# Altium PCB nixie-tube-power.PcbDoc
Units mm, origin at the board's own origin, x right, y up, seen from the top; angles counter-clockwise.
Board outline 27 x 44 mm, 2 copper layers (Top Layer, Bottom Layer); 22 components, 16 nets, 65 pads, 8 vias.
Unrouted connection lines stored in the file: 1.
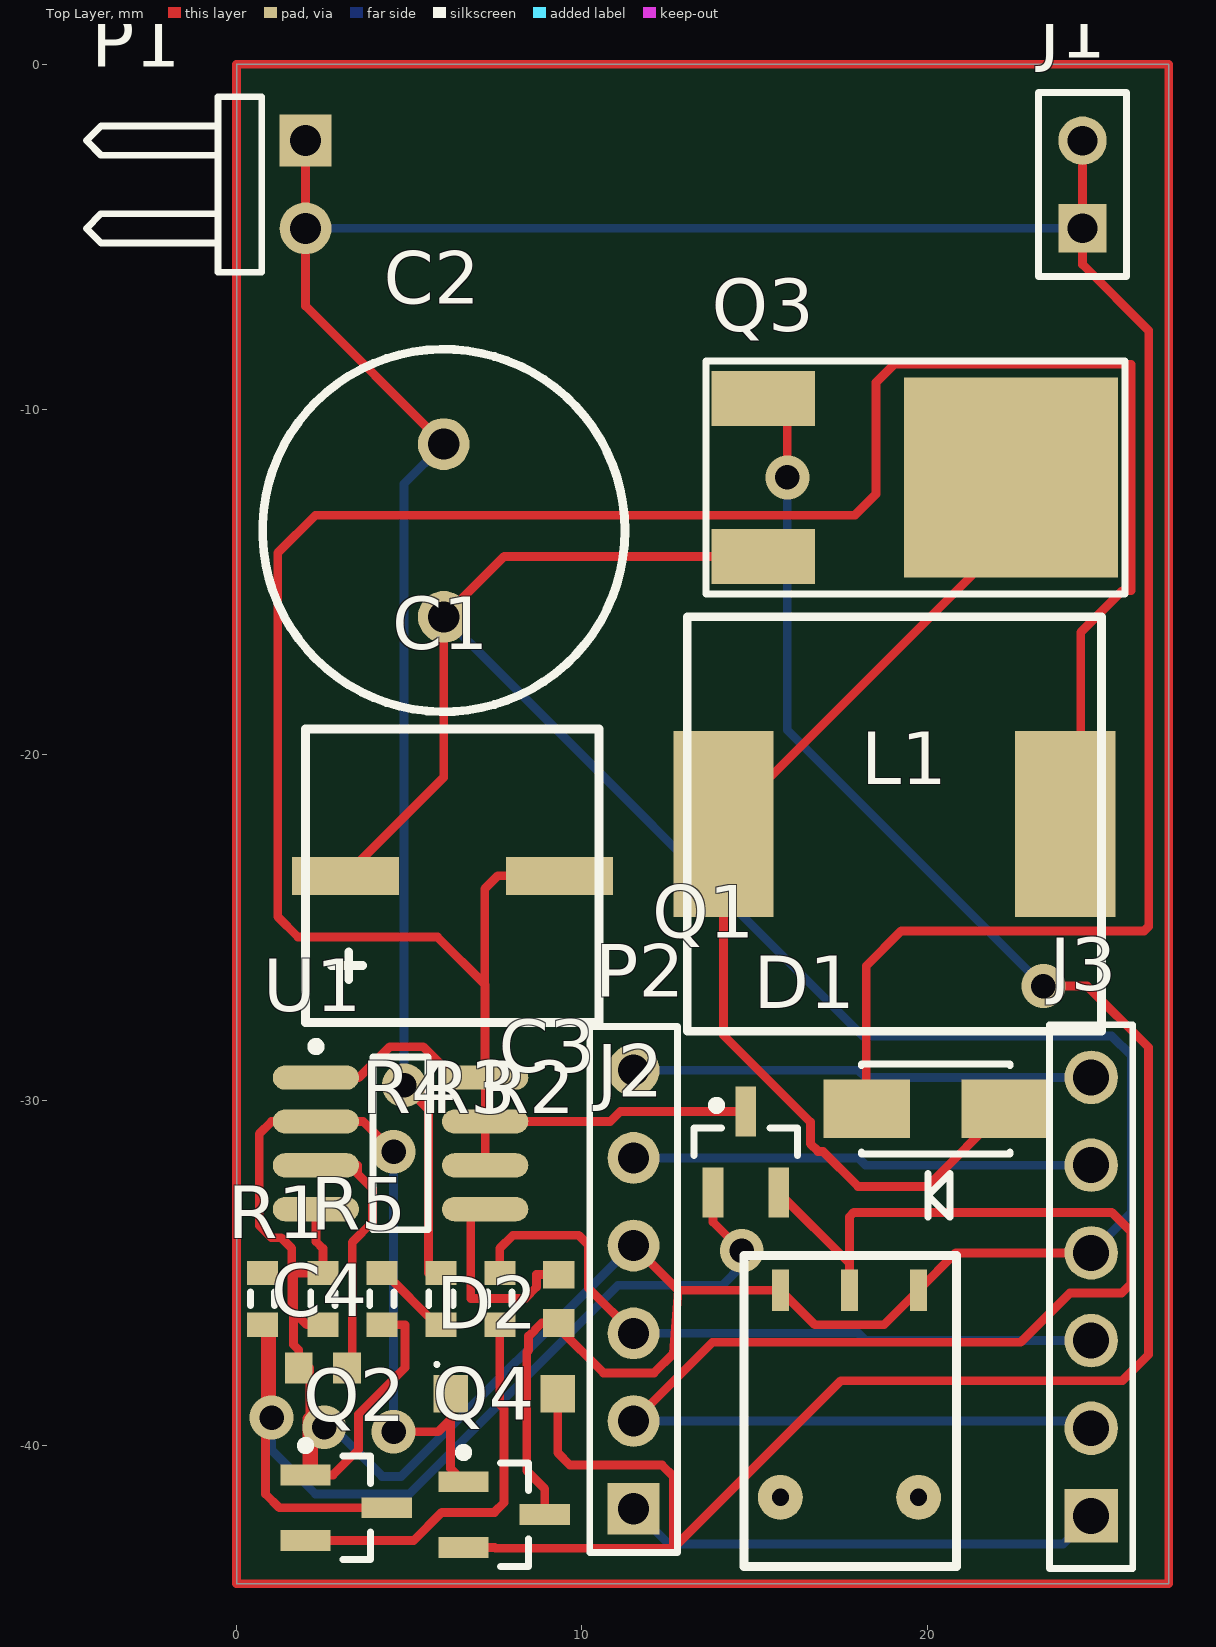
[diagram p0: Top Layer view]
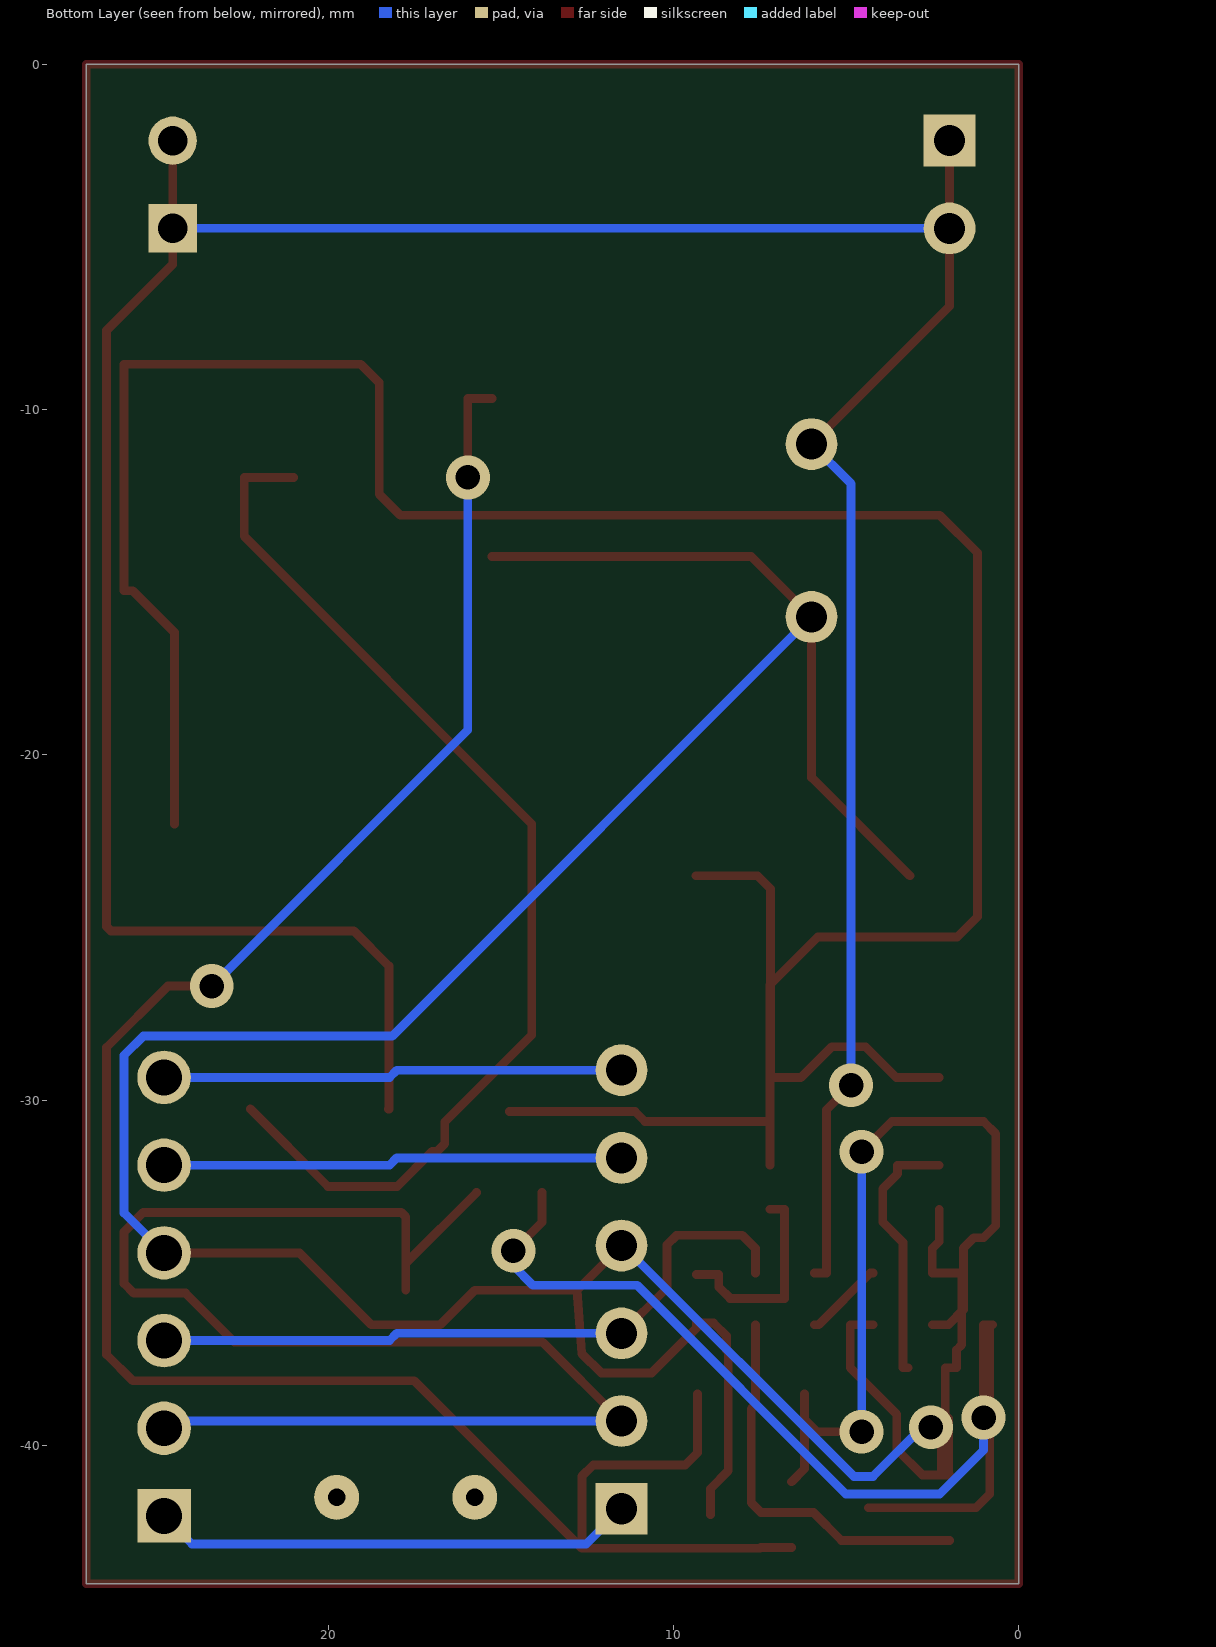
[diagram p1: Bottom Layer view, seen from below]

## Layer stack, top to bottom
Top Solder: solder mask 0.0102, Solder Resist, Dk 3.5
Top Layer: signal copper 0.0356
Dielectric 1: dielectric 0.32, FR-4, Dk 4.8
Bottom Layer: signal copper 0.0356
Bottom Solder: solder mask 0.0102, Solder Resist, Dk 3.5

## Board outline
0,-44 27,-44 27,0 0,0

## Design rules (kind name [scope] priority, off if disabled: settings)
Clearance [All] p1: gap=0.254 ignorepadtopadclearanceinfootprint=FALSE except(0: Arc-Hole Track-Hole SMDPad-Hole THPad-Hole Via-Hole Fill-Hole Poly-Hole Region-Hole Text-Hole)
PolygonConnect [All] p1: connectstyle=Relief reliefconductorwidth=0.254 reliefentries=4 polygonreliefangle="90 Angle" airgapwidth=0.254
RoomDefinition nixie-tube-power [InComponentClass('nixie-tube-power')] p1: confinementstyle=ConfineIn formatcopy=TRUE lockcomponents=FALSE outline 28.08,-42.502 62.58,-42.502 62.58,-27.752 28.08,-27.752
RoutingVias [All] p1: holewidth=0.711 width=1.27 viastyle="Through Hole" minholewidth=0.711 minwidth=1.27 maxholewidth=0.711 maxwidth=1.27
SolderMaskExpansion [All] p1: expansion=0.102
Width [All] p1: maxlimit=0.254 minlimit=0.254 preferedwidth=0.254
30 further rules are at their usual default settings.

## Components (designator, comment, footprint, x,y, rotation, side; value= is the part's Value field where it differs from the comment)
C1 "Cap" 220uF-35V-smd 6.25,-23.5 r90 top value=220uF
C2 "Cap" RB5-10.5 6,-13.5 r90 top value=4.7uF
C3 "Cap" 1608[0603] 9.332,-35.75 r90 top value=0.01uF
C4 "Cap" 1608[0603] 2.5,-37.75 r0 top value=0.01uF
D1 "RS1M" DIOD-SMA-2_A_V 20.25,-30.25 r180 top
D2 "Diode 1N4148" SODFL350X110-2N 7.75,-38.5 r0 top
J1 "SLW-102-01-F-S" SMTC-SLW-102-01-X-S 24.5,-4.75 r90 top
J2 "DC003a" DC003A 15.75,-41.5 r90 top
J3 "SSW-106-02-G-S" SMTC-SSW-106-02-X-S 24.75,-42.04 r90 top
L1 "CD127-inductor" cd127-220uH 19.05,-22 r0 top value=220uH
P1 "Header 2H" HDR1X2H 2,-2.21 r270 top
P2 "Header 6" HDR1X6 11.5,-41.83 r90 top
Q1 "AO3407" SOT23_M 14.75,-31.5 r90 top
Q2 "npn" SOT-23_M 3.175,-41.8 r0 top
Q3 "FQD5N60C" SC_TO-252AA 22.43,-11.964 r180 top
Q4 "SS850" SOT-23_M 7.75,-42 r0 top
R1 "Res1" J1-0603 0.75,-35.75 r90 top value=1K
R2 "Res1" J1-0603 7.624,-35.75 r90 top value=1K
R3 "Res1" J1-0603 5.916,-35.75 r90 top value=1K
R4 "Res1" J1-0603 4.208,-35.75 r90 top value=1K
R5 "Res1" J1-0603 2.5,-35.75 r270 top value=1K
U1 "MC34063EBD-TR" SO8_M 4.75,-31.25 r0 top

## Footprints (in the part's own frame and the unit in brackets; to place one, negate y for a bottom-side part, rotate by r counter-clockwise, add the part's x,y. Pads: shape width x height; smd on the part's side, far side on the other; paste and mask are expansions set on the pad)
220uF-35V-smd [mm] "smd capacitance"
  rect 1.1x3.1 smd: 1(0,3.1) 2(0,-3.1)
  silkscreen extent -4.25,-4.25 4.25,4.25
1608[0603] [mm] "Chip Capacitor, Body 1.6x0.8mm, IPC High Density"
  rect 0.8x0.9 smd: 1(-0.7,0) 2(0.7,0)
  body extent -0.87,-0.48 0.87,0.48, height 1.3
cd127-220uH [mm] "smd inductor 220uH"
  rect 2.9x5.4 smd: 1(-4.95,0) 2(4.95,0)
  silkscreen extent -6,-6 6,6
DC003A [mm] "Dc jack 003A"
  rect 1.2x0.5 smd: 1(6,-2) 2(6,0) 3(6,-4)
  round 1.3 hole 0.5 unplated: ~(0,0) ~(0,-4)
  silkscreen extent -2,-5.1 7,1.05
DIOD-SMA-2_A_V [mm] "SMA, 2-Leads, Body 4.3x2.605mm"
  rect 2.5x1.7 smd: 1(-2,0) 2(2,0)
  silkscreen extent -2.15,-1.3 2.15,3.14, body extent -2.52,-1.46 2.52,1.46, height 2.4
HDR1X2H [mm] "Connector; Header; 2 Position; Right Angle"
  rect 1.5x1.5 hole 0.9: 1(0,0)
  round 1.5 hole 0.9: 2(2.54,0)
  silkscreen extent -1.27,-6.35 3.81,-1.27
HDR1X6 [mm] "Connector; Header; 6 Position"
  rect 1.5x1.5 hole 0.9: 1(0,0)
  round 1.5 hole 0.9: 2(2.54,0) 3(5.08,0) 4(7.62,0) 5(10.16,0) 6(12.7,0)
  silkscreen extent -1.27,-1.27 13.97,1.27
J1-0603 [mm] "Chip Resistor, Body 1.6x0.8mm, IPC High Density"
  rect 0.7x0.9 smd: 1(-0.75,0) 2(0.75,0)
  silkscreen extent -0.2,-0.35 0.2,0.35, body extent -0.85,-0.48 0.85,0.48, height 0.9
RB5-10.5 [mm] "Capacitor (Radial); 2 Leads"
  round 1.5 hole 0.9: 1(-2.5,0) 2(2.5,0)
  silkscreen extent -5.25,-5.25 5.25,5.25
SC_TO-252AA [mm] "D-PAK"
  rect 3x1.6 smd: 1(7.18,-2.286) 3(7.18,2.286)
  rect 6.2x5.8 smd: 2(0,0)
  silkscreen extent -3.3,-3.38 8.84,3.38, body extent -2.7,-3.29 7,3.29, height 2.3
SMTC-SLW-102-01-X-S [mm] "Low Profile Socket Strip, 1x2 Pins, Vertical, 2.54mm Pitch, Female"
  rect 1.4x1.4 hole 0.86: 1(0,0)
  round 1.4 hole 0.86: 2(2.54,0)
  silkscreen extent -1.39,-1.27 3.94,1.27, body extent -1.27,-1.27 3.81,1.27, height 4.57
SMTC-SSW-106-02-X-S [mm] "SQ Post Socket, 1x6 Pins, Vertical, 2.54mm Pitch, Female"
  rect 1.55x1.55 hole 1.04: 1(0,0)
  round 1.55 hole 1.04: 2(2.54,0) 3(5.08,0) 4(7.62,0) 5(10.16,0) 6(12.7,0)
  silkscreen extent -1.53,-1.2 14.23,1.21, body extent -1.52,-1.21 14.22,1.21, height 8.51
SO8_M [mm] "SOIC, 8-Leads, Body 4.9x3.9mm, Pitch 1.27mm, IPC Low Density"
  oval 2.5x0.7 smd: 1(-2.45,1.905) 2(-2.45,0.635) 3(-2.45,-0.635) 4(-2.45,-1.905) 5(2.45,-1.905) 6(2.45,-0.635) 7(2.45,0.635) 8(2.45,1.905)
  silkscreen extent -2.57,-2.5 0.8,2.93, body extent -2,-2.5 2,2.5, height 1.75
SODFL350X110-2N [mm] "SODFL, 2-Leads, Body 1.70x3.50mm, IPC Medium Density"
  rect 1x1.1 smd: 1(-1.55,0) 2(1.55,0)
  silkscreen extent -2,0.8 -1.9,0.9, body extent -1.75,-0.95 1.75,0.95, height 1.1
SOT23_M [mm] "SOT23, 3-Leads, Body 2.9x1.3mm, Pitch 0.95mm, Lead Span 2.3mm - Reverse Pinning, IPC Low Density"
  rect 1.45x0.6 smd: 1(-1.175,0.95) 2(1.175,0) 3(-1.175,-0.95)
  silkscreen extent -0.1,-1.5 1.47,1.5, body extent -0.7,-1.5 0.7,1.5, height 1.1
SOT-23_M [mm] "SOT23, 3-Leads, Body 2.9x1.3mm, Pitch 0.95mm, Lead Span 2.5mm, IPC Low Density"
  rect 1.45x0.6 smd: 1(-1.175,0.95) 2(-1.175,-0.95) 3(1.175,0)
  silkscreen extent -1.3,-1.5 0.7,1.92, body extent -0.7,-1.5 0.7,1.5, height 1.1

## Part data
C1 C3 C4: "Capacitor", LatestRevisionDate=17-Jul-2002, LatestRevisionNote="Re-released for DXP Platform.", PackageDescription="Radial Cap, Thru-Hole; 2 Leads; 0.3 in Pin Spacing", PackageReference=RAD-0.3, Published=8-Jun-2000, Publisher="Altium Limited"
  C1: PurchaseLink=https://world.taobao.com/item/537495926937.htm
  C3 C4: PurchaseLink=https://world.taobao.com/item/525960892359.htm
C2: "Capacitor", Voltage=250V, LatestRevisionDate=17-Jul-2002, LatestRevisionNote="Re-released for DXP Platform.", PackageDescription="Radial Cap, Thru-Hole; 2 Leads; 0.3 in Pin Spacing", PackageReference=RAD-0.3, Published=8-Jun-2000, Publisher="Altium Limited", PurchaseLink=https://world.taobao.com/item/525902443723.htm
D1: library part CMP-1667-00001-4, "Ultra-Fast Rectifier, 1 A, 1.7 V, -65 to 150 degC, 2-Pin SMD, RoHS, Tape and Reel", Manufacturer="Diodes Inc", Max Operating Temperature="150 degC", Min Operating Temperature="-65 degC", Package Quantity=1, ComponentLink1Description="Manufacturer URL", ComponentLink1URL=http://www.diodes.com/, ComponentLink2Description=Datasheet, ComponentLink2URL=http://www.diodes.com/_files/datasheets/ds16008.pdf, DatasheetVersion="Rev. 11-2, 12/2014", Height="2.1 mm", Length="4.6 mm", Mount="Surface Mount", Mounting Technology="Surface Mount", PackageDescription="2-Pin Surface Mount Device, Body 4.3 x 2.605 mm", PackageReference=SMA-2, Packaging="Cut Tape", Pins=2, PurchaseLink=https://world.taobao.com/item/526206815649.htm, REACH SVHC=Yes, RoHSCompliant=true
D2: "High Conductance Fast Diode", Code_JEDEC=DO-204-AH, ComponentLink1Description="Manufacturer Link", ComponentLink1URL=http://www.fairchildsemi.com/, ComponentLink2Description=Datasheet, ComponentLink2URL=http://www.fairchildsemi.com/ds/1N%2F1N4148.pdf, DatasheetVersion=1997, LatestRevisionDate=17-Jul-2002, LatestRevisionNote="Re-released for DXP Platform.", PackageDescription="Diode, Axial; Body 3.8 x 1.9 mm (LxDia. max), Lead Dia. 0.53 mm (max)", PackageReference=DO-35, Published=8-Jun-2000, Publisher="Altium Limited", PurchaseLink=https://world.tmall.com/item/547099216928.htm
J1: library part CMP-1023-00122-1, "Low Profile Socket Strips, Through-hole, Vertical, -55 to 125 degC, 2.54 mm Pitch, 2-Pin, Female, RoHS", Manufacturer=Samtec, Temperature Range="-55 to 125 degC", ComponentLink1Description="Manufacturer URL", ComponentLink1URL=http://www.samtec.com, ComponentLink2Description=Datasheet, ComponentLink2URL=http://www.samtec.com/documents/webfiles/pdf/SLW.PDF, ComponentLink3Description="Package Specification", ComponentLink3URL=http://www.samtec.com/documents/webfiles/cpdf/SLW-1XX-01-X-X-MKT.pdf, DatasheetVersion=F-214, Mounting Technology=Through-hole, Orientation=Vertical, PackageDescription="Low Profile Socket Strip", PackageReference=SLW-102-01-X-S, PackageVersion="X, 9/1987", PartNumber=SLW-102-01-F-S, Pitch="2.54 mm", RoHS=True
J2: library part CMP-2000-06895-1, "Through Hole Right Angle DC Power Jack, 2.5 A, 2 mm Center Pin, 3 Position, -25 to 85 degC, RoHS, Bulk", Current Rating=2.5A, Flammability Rating=UL94V-0, Insulation Resistance=50MOhms, Manufacturer=CUIInc., Operating Temperature Range=-25Cto+85C, Package Description="3-Pin Through Hole Device, Body 14.4 x 9 mm, Height 11 mm", Package Reference=PJ-002A, Voltage Rating=24V, Brand=CUI, Connector Type=DCPowerJack, Contact Gender=Male, Contact Material=Copper, Contact Plating=Nickel, Datasheet URL=http://www.cui.com/product/resource/pj-002a.pdf, Datasheet Version="Rev. 1.03, 04/2016", Factory Pack Quantity=500, Housing Material=PolybutyleneTerephthalate(PBT), Inside Contact Diameter=2mm, Manufacturer URL=http://www.cui.com/, Mounting Angle=Right, Mounting Style=ThroughHole, Mounting Technology=ThroughHole, Outside Contact Diameter=6.5mm, Product=Jacks, Product Category=DCPowerConnectors, RoHS=True, Termination Style=ThroughHole
J3: library part CMP-1023-00359-1, "SQ Post Socket, Through-hole, Vertical, -55 to 125 degC, 2.54mm Pitch, 6-Pin, Female, RoHS", Manufacturer=Samtec, Temperature Range="-55 to 125 degC", ComponentLink1Description="Manufacturer URL", ComponentLink1URL=http://www.samtec.com, ComponentLink2Description=Datasheet, ComponentLink2URL=http://www.samtec.com/documents/webfiles/pdf/SSW_TH.PDF, ComponentLink3Description="Package Specification", ComponentLink3URL=http://www.samtec.com/documents/webfiles/cpdf/SSW-1XX-XX-XXX-X-XX-XXX-XX-MKT.pdf, DatasheetVersion=F-214, Mounting Technology=Through-hole, Orientation=Vertical, PackageDescription="Assembly, Socket Strip .016 X .031 Tail", PackageReference=SSW-106-02-X-S, PackageVersion="CA, 6/1987", PartNumber=SSW-106-02-G-S, Pitch="2.54 mm", RoHS=True
L1: library part Inductor, "Inductor", Code_IEC=1005, Code_JEITA=0402, LatestRevisionDate=29-May-2009, LatestRevisionNote="IPC-7351 Footprint Added.", PackageDescription="Chip Inductor", PackageReference=0402-A, Published=8-Jun-2000, Publisher="Altium Limited", PurchaseLink=https://world.taobao.com/item/555745401299.htm
P1: "Header, 2-Pin, Right Angle", LatestRevisionDate=17-Jul-2002, LatestRevisionNote="Re-released for DXP Platform.", Publisher="Altium Limited"
P2: "Header, 6-Pin", LatestRevisionDate=17-Jul-2002, LatestRevisionNote="Re-released for DXP Platform.", Publisher="Altium Limited"
Q1: library part PMOS-2, "P-Channel Power MOSFET", ComponentLink1Description="Manufacturer Link", ComponentLink1URL=https://world.taobao.com/item/536175949073.htm, DatasheetVersion=PD-9.390D, LatestRevisionDate=17-Jul-2002, LatestRevisionNote="Re-released for DXP Platform.", Note="Pin 4 not drawn and electrically connected to Pin 2.", PackageDescription="TO, Thru-Hole, Vertical, Heatsink Mounted; 3 In-Line Leads; Pitch 2.54 mm", PackageReference=TO-220AB, PackageVersion=Feb-1997, Published=8-Jun-2000, Publisher="Altium Limited", PurchaseLink=https://world.taobao.com/item/536175949073.htm
Q2: library part 2N3904, "NPN General Purpose Amplifier", ComponentLink1Description="Manufacturer Link", ComponentLink1URL=http://www.fairchildsemi.com/, ComponentLink2Description=Datasheet, ComponentLink2URL=http://www.fairchildsemi.com/ds/2N%2F2N3904.pdf, DatasheetVersion=1997, LatestRevisionDate=15-Jan-2003, LatestRevisionNote="PCB Footprint 'BCY-W3/D4.7' replaced", PackageDescription="TO, Flat Index; 3 In-Line, Axial Leads; Body Dia. 4.5mm; Leads 0.51 x 0.48 mm (max)", PackageReference=TO-92A, PackageVersion=Sep-1998, Published=8-Jun-2000, Publisher="Altium Limited"
Q3: library part NMOS-2, "N-Channel Power MOSFET", ComponentLink1Description="Manufacturer Link", ComponentLink1URL=http://www.irf.com/, DatasheetVersion=PD-9.814, LatestRevisionDate=17-Jul-2002, LatestRevisionNote="Re-released for DXP Platform.", Note="Pin 2 is electrically connected to pin 4.", PackageDescription="TO, Thru-Hole, Vertical, Heatsink Mounted; 3 In-Line Leads; Pitch 2.54 mm", PackageReference=TO-220AB, PackageVersion=Feb-1997, Published=8-Jun-2000, Publisher="Altium Limited", PurchaseLink=https://world.tmall.com/item/44219312542.htm
Q4: library part 2N3906, "PNP General Purpose Amplifier", ComponentLink1Description="Manufacturer Link", ComponentLink1URL=http://www.fairchildsemi.com/, ComponentLink2Description=Datasheet, ComponentLink2URL=http://www.fairchildsemi.com/ds/2N%2F2N3906.pdf, DatasheetVersion=1997, LatestRevisionDate=15-Jan-2003, LatestRevisionNote="PCB Footprint 'BCY-W3/D4.7' replaced", PackageDescription="TO, Flat Index; 3 In-Line, Axial Leads; Body Dia. 4.5mm; Leads 0.51 x 0.48 mm (max)", PackageReference=TO-92A, PackageVersion=Sep-1998, Published=8-Jun-2000, Publisher="Altium Limited", PurchaseLink=https://world.taobao.com/item/525943897429.htm
R1 R2 R3 R4 R5: "Resistor", LatestRevisionDate=17-Jul-2002, LatestRevisionNote="Re-released for DXP Platform.", PackageDescription="Axial Device, Thru-Hole; 2 Leads; 0.3 in Pin Spacing", PackageReference=AXIAL-0.3, Published=8-Jun-2000, Publisher="Altium Limited"
U1: library part CMP-0241-00013-1, "DC/DC converter control circuit, 8-Pin SO, Tape and Reel", Code_IPC=SOIC127P600-8, Code_JEDEC=MS-012-AA, ComponentLink1Description="Manufacturer URL", ComponentLink1URL=http://www.st.com, ComponentLink2Description=Datasheet, ComponentLink2URL=http://www.st.com/internet/com/TECHNICAL_RESOURCES/TECHNICAL_LITERATURE/DATASHEET/CD00001232.pdf, ComponentLink3Description="Package Specification", ComponentLink3URL=http://www.st.com/internet/com/TECHNICAL_RESOURCES/TECHNICAL_LITERATURE/PACKAGE_INFORMATION/CD00004680.pdf, DatasheetVersion=Nov-2007, PackageDescription="8-Pin Small Outline Integrated Circuit 1.27 mm Pitch", PackageReference=SO8, PackageVersion=Dec-2002

## Via types
v1: diameter 1.27, hole 0.711, Top Layer to Bottom Layer, 6 vias
v2: diameter 1.27, hole 0.711, Top Layer to Bottom Layer, tented top, 2 vias

## Nets (pads, with @x,y where several pads share a name; then routed paths per layer and width w, separated by ;. In a path a pad name is that pad's centre, name@x,y a point inside that pad or via, vN(x,y) a via of type N, cw(c..) or ccw(c..) an arc to the next point about the centre after c; other vN are vias at no path point)
Fb: C3.2 U1.5 | length 6
  Top Layer w0.254: U1.5 6.782,-33.155 6.782,-35.738 8.357,-35.738 8.687,-35.408 8.687,-35.05 C3.2
GND: C1.1 C2.1 C3.1 C4.1 J2.2 J2.3 J3.4 P2.4 Q2.1 Q3.3 Q4.3 R4.1 R5.1 U1.4 | length 107.1
  Top Layer w0.254: Q2.1 Q2.1@2.032,-40.85 ; U1.4 2.3,-34.091 2.5,-34.292 R5.1 1.651,-35 1.651,-37.084 1.8,-37.233 C4.1 2.123,-37.75 2.123,-39.115 2.032,-39.206 Q2.1@2.032,-40.85 ; v1(2.54,-39.472) 2.235,-39.776 Q2.1@2.235,-40.85 ; C1.1 6,-20.65 C2.1 7.75,-14.25 Q3.3 ; R4.1 4.877,-36.5 4.877,-37.744 3.531,-39.091 3.531,-40.113 2.794,-40.85 Q2.1@2.235,-40.85 ; Q4.3 8.925,-41.25 8.407,-40.732 8.407,-37.287 8.458,-37.236 8.458,-36.83 8.838,-36.45 C3.1 9.332,-36.601 10.627,-37.897 12.09,-37.897 12.649,-37.338 12.79,-35.5 ; P2.4 12.79,-35.5 ; J3.4 20.83,-34.42 J2.3 18.75,-36.5 16.75,-36.5 J2.2 12.79,-35.5 ; Q2.1@2.032,-40.85 Q2.1@2.235,-40.85
  Bottom Layer w0.254: v1(2.54,-39.472) 2.794,-39.472 4.216,-40.894 4.773,-40.894 11.457,-34.21 P2.4 ; C2.1 18.143,-28.143 25.349,-28.143 25.908,-28.702 25.908,-33.262 J3.4
MOSI: J3.6 P2.6 | length 13.3
  Bottom Layer w0.254: P2.6 18.009,-29.13 18.219,-29.34 J3.6
NetC1_2: C1.2 L1.2 Q1.2 U1.1 U1.6 U1.7 U1.8 | length 86.6
  Top Layer w0.254: U1.1 3.537,-29.345 4.434,-28.448 5.41,-28.448 6.307,-29.345 U1.8@7.188,-29.345 ; U1.6 U1.7 ; C1.2 7.564,-23.5 7.188,-23.876 7.188,-26.645 ; Q1.2 11.11,-30.325 10.82,-30.615 U1.7 ; L1.2@24.45,-22 24.45,-16.449 25.654,-15.245 25.911,-15.245 25.911,-8.683 19.05,-8.683 18.517,-9.216 18.517,-12.446 17.907,-13.056 2.286,-13.056 1.194,-14.148 1.194,-24.689 1.778,-25.273 5.817,-25.273 7.188,-26.645 ; U1.8@7.188,-29.345 7.188,-26.645 ; U1.8@7.188,-29.345 U1.8 ; 7.188,-26.645 7.2,-26.656 U1.8 ; U1.7 U1.8
NetC2_2: C2.2 D1.2 J1.1 J1.2 P1.1 P1.2 R3.2 | length 94.4
  Top Layer w0.254: P1.1 P1.2 2,-7 C2.2 ; v1(4.851,-29.566) 5.563,-30.277 5.563,-35 R3.2 ; D1.2 18.237,-30.25 18.237,-26.111 19.253,-25.095 26.289,-25.095 26.419,-24.965 26.419,-7.712 24.5,-5.793 J1.1 J1.2
  Bottom Layer w0.254: P1.2 J1.1 ; v1(4.851,-29.566) 4.851,-12.149 C2.2
NetD1_1: D1.1 L1.1 Q3.2 | length 32.3
  Top Layer w0.254: Q3.2@21.001,-11.964 Q3.2 22.43,-13.67 L1.1 14.1,-28.111 16.619,-30.63 16.619,-31.258 16.842,-31.481 16.981,-31.481 18,-32.5 20,-32.5 D1.1
NetD2_1: D2.1 Q4.1 R5.2 U1.2 | length 23.7
  Top Layer w0.254: R5.2 2.032,-36.5 1.6,-36.068 1.6,-34.29 1.295,-33.985 1.016,-33.985 0.66,-33.63 0.66,-30.971 1.016,-30.615 U1.2 3.672,-30.615 v1(4.547,-31.49) ; v1(4.547,-39.599) 5.842,-39.599 6.2,-39.241 ; D2.1 6.2,-39.241 ; Q4.1 6.2,-40.675 6.2,-39.241
  Bottom Layer w0.254: v1(4.547,-39.599) v1(4.547,-31.49)
NetD2_2: D2.2 Q3.1 Q4.2 | length 63.1
  Top Layer w0.254: Q4.2 7.468,-42.95 7.494,-42.977 12.649,-42.977 ; D2.2 9.3,-40.212 9.652,-40.564 12.319,-40.564 12.649,-40.894 12.649,-42.977 ; Q3.1 15.951,-9.678 v2(15.951,-11.963) ; v2(23.368,-26.695) 24.638,-26.695 26.414,-28.471 26.414,-37.365 25.654,-38.125 17.501,-38.125 12.649,-42.977
  Bottom Layer w0.254: v2(15.951,-11.963) 15.951,-19.279 v2(23.368,-26.695)
NetQ1_1: Q1.1 Q2.3 R1.1 | length 31.8
  Top Layer w0.254: R1.1 R1.1@0.838,-36.5 ; v1(1.016,-39.192) 1.016,-36.5 R1.1@0.838,-36.5 ; Q2.3 1.236,-41.8 0.838,-41.402 R1.1@0.838,-36.5 ; Q1.1 13.8,-33.528 v1(14.63,-34.358)
  Bottom Layer w0.254: v1(1.016,-39.192) 1.016,-40.132 2.286,-41.402 5.004,-41.402 11.049,-35.357 14.072,-35.357 14.63,-34.798 v1(14.63,-34.358)
NetQ2_2: Q2.2 R2.1 | length 11.4
  Top Layer w0.254: Q2.2 5.129,-42.75 5.944,-41.935 7.468,-41.935 7.747,-41.656 7.747,-38.938 7.62,-38.811 7.62,-36.5 R2.1
NetR3_1: R3.1 R4.2 | length 2.3
  Top Layer w0.254: R4.2 4.293,-35 5.793,-36.5 R3.1
OE: J3.1 P2.1 | length 14
  Bottom Layer w0.254: P2.1 12.52,-42.85 23.94,-42.85 J3.1
PWREN: J3.3 P2.3 R2.2 | length 20
  Top Layer w0.254: R2.2 7.624,-34.29 8.005,-33.909 9.906,-33.909 10.185,-34.188 10.185,-35.435 P2.3
  Bottom Layer w0.254: P2.3 18.009,-36.75 18.219,-36.96 J3.3
SCK: J3.5 P2.5 | length 13.3
  Bottom Layer w0.254: P2.5 18.009,-31.67 18.219,-31.88 J3.5
Tc: C4.2 U1.3 | length 7.6
  Top Layer w0.254: U1.3 3.505,-31.885 3.505,-32.131 3.937,-32.563 3.937,-33.528 3.353,-34.112 3.353,-37.75 C4.2
VCC: J2.1 J3.2 P2.2 Q1.3 R1.2 | length 44.4
  Top Layer w0.254: P2.2 13.782,-37.008 22.708,-37.008 24.13,-35.585 25.627,-35.585 25.906,-35.306 25.906,-33.805 25.349,-33.249 17.877,-33.249 17.75,-33.376 17.75,-34.725 ; Q1.3 17.75,-34.725 ; J2.1 17.75,-34.725
  Bottom Layer w0.254: P2.2 24.54,-39.29 J3.2
pads on no net: J2.~
copper on no net: | length 142
  Top Layer w0.254: 0,-44 27,-44 27,0 0,0 0,-44